# EAGLE board front_wheel_encoder (EAGLE 7.6.0)
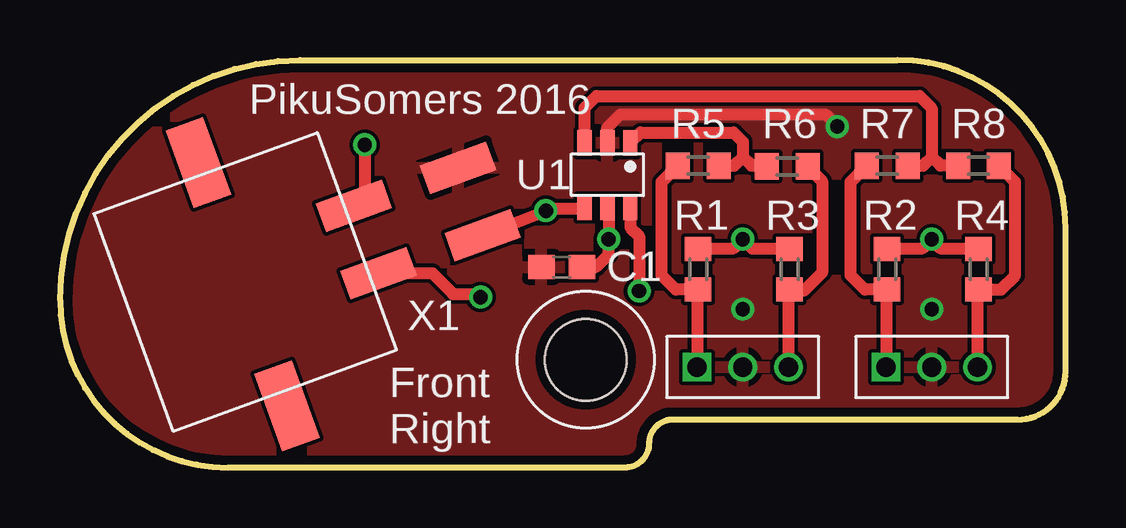
[diagram p0: board, top side]
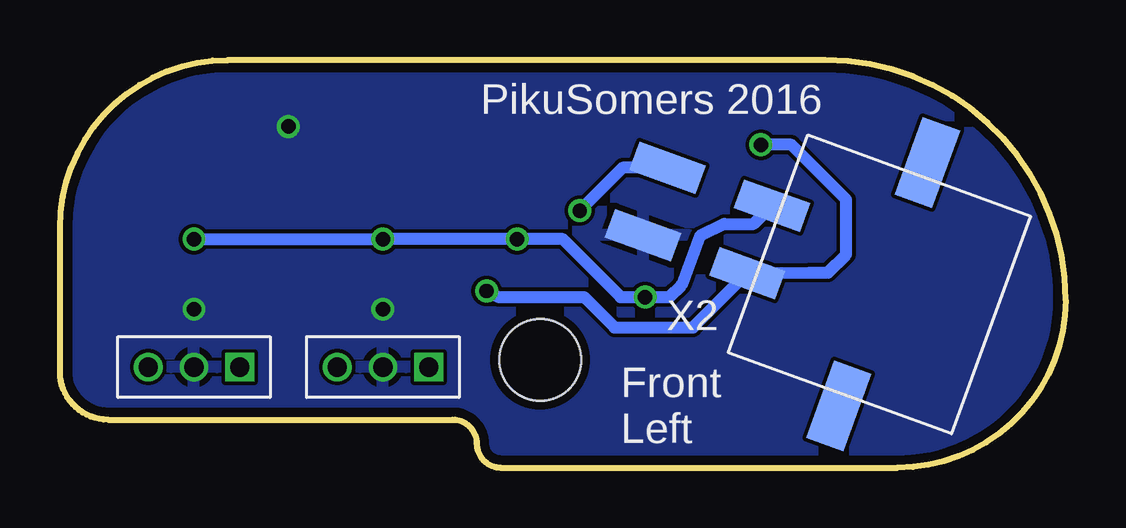
[diagram p1: board, bottom side, seen from below]

Size 41.9 x 17 mm. Coordinates in mm from the lower left corner, seen from the top.
Outline: 39.9,2 arc90 41.9,4 41.9,10 arc90 34.9,17 10,17 arc90 0,7 arc90 7,0 23.54,0 arc90 24.54,1 arc-90 25.54,2 39.9,2
Copper layers (1*16): Top 0.0356mm / dielectric 1.5011mm / Bottom 0.0356mm
Design rules "oshpark-2layer": minimum track width 6mil, minimum drill 13mil, track to track 6mil, track to pad 6mil, pad to pad 6mil, via to via 6mil, smd to smd 6mil, copper to edge 15mil, drill to drill 6mil, minimum pad ring 7mil, minimum via ring 7mil, stop-mask expansion 2.5mil, vias tented up to drill 0mil, thermal gap 10mil
Holes 3.4 mm at 21.9,4.5

## Footprints (pad centres in the part's own frame; a part is rotated, then mirrored left to right if it is on the bottom)
C0603 = smd 1.1 x 1: 1 -0.85,0; 2 0.85,0
HLC1395 = drill 0.8: COL 3.81,0; COM 1.905,0 | drill 0.8 square: LED+ 0,0
R0603 = smd 1 x 1.1: 1 -0.85,0; 2 0.85,0
SOT-23-6 = smd 0.6 x 1.05: 1 0,0; 2 0.95,0; 3 1.9,0; 4 1.9,2.7; 5 0.95,2.7; 6 0,2.7
MICROFIT-2X2-0430450411 = smd 1.27 x 2.921: 1 6.896,5.474; 2 3.899,5.474; 3 6.896,10.097; 4 3.899,10.097 | smd 3.429 x 1.651: NC1 0,0; NC2 10.795,0

## Placement (x,y rotation side)
C1  0.1uF  [C0603]  20.91,8.37 180 top
IR1  HLC1395  [HLC1395]  26.54,4.19 0 top
IR2  HLC1395  [HLC1395]  34.42,4.19 0 top
R1  200  [R0603]  26.59,8.27 90 top
R2  200  [R0603]  34.46,8.27 90 top
R3  4.7k  [R0603]  30.4,8.27 90 top
R4  4.7k  [R0603]  38.27,8.27 90 top
R5  0  [R0603]  26.59,12.59 0 top
R6  0  [R0603]  30.31,12.56 180 top
R7  0  [R0603]  34.46,12.59 0 top
R8  0  [R0603]  38.27,12.59 180 top
U1  SN74LVC2G17DBVR  [SOT-23-6]  23.76,13.54 180 top
X1  MICROFIT-2X2-SMD  [MICROFIT-2X2-0430450411]  5.77,12.71 290 top
X2  MICROFIT-2X2-SMD  [MICROFIT-2X2-0430450411]  9.46,2.57 70 bottom

## Library data of the parts
C1 R1-R8 = resistor
IR1 IR2 U1 X1 X2 = rover12

## Nets
+5V: C1.1 R1.2 R2.2 R3.2 R4.2 U1.5 X1.1 X2.1
GND: C1.2 IR1.COM IR2.COM U1.2 X1.4 X2.4
N$1: IR1.LED+ R1.1 R5.1
N$2: IR2.LED+ R2.1 R7.1
N$3: IR2.COL R4.1 R8.1
N$4: U1.4 X1.3 X2.3
N$5: U1.6 X1.2 X2.2
N$6: IR1.COL R3.1 R6.1
SENSE1: R5.2 R6.2 U1.1
SENSE2: R7.2 R8.2 U1.3

## Tracks (layer width: path | path; a pad name or v marks a point on that pad's centre or on a via)
+5V  (via drill 0.6)
  Top 0.508: R1.2 26.62,9.14 28.07,9.14 v28.45,9.53 28.86,9.12 R3.2 | R2.2 34.49,9.14 35.94,9.14 v36.32,9.53 36.73,9.12 R4.2 | U1.5 22.86,10.84 v22.86,9.53 22.86,8.89 22.34,8.37 C1.1 | X1.1 15.52,8.11 16.38,7.24 17.4,7.24 v17.53,7.11
  Bottom 0.508: v36.32,9.53 v28.45,9.53 v22.86,9.53 20.95,9.53 18.54,7.11 v17.53,7.11 16.51,7.11 16,7.62 15.24,9.65 14.22,10.16 13.01,10.16 X2.1
GND  (via drill 0.6)
  Top 0.508: U1.2 22.81,14.18 23.37,14.73 31.88,14.73 v32.38,14.22
  other vias: 28.45,6.6 36.32,6.6
  pour Bottom: 6.86,0 23.8,0 arc90 24.56,0.76 24.56,1.02 arc-90 25.57,2.03 40.13,2.03 arc90 41.91,3.81 41.91,10.16 arc90 35.05,17.02 9.91,17.02 arc90 0,7.11 0,6.86 arc90
  pour Top: 6.86,0 23.54,0 arc90 24.56,1.02 arc-90 25.57,2.03 40.13,2.03 arc90 41.91,3.81 41.91,10.16 arc90 35.05,17.02 9.91,17.02 arc90 0,7.11 0,6.86 arc90
N$1
  Top 0.508: R5.1 25.07,11.91 25.07,8.01 25.66,7.42 R1.1 26.54,7.42 IR1.LED+
N$2
  Top 0.508: R7.1 32.94,11.91 32.94,8.01 33.54,7.42 R2.1 34.42,7.42 IR2.LED+
N$3
  Top 0.508: R8.1 39.8,11.91 39.8,8.01 39.2,7.42 R4.1 38.23,7.42 IR2.COL
N$4  (via drill 0.6)
  Top 0.508: X1.3 20.11,10.66 | 20.11,10.66 v20.25,10.72 | v20.25,10.72 20.45,10.79 21.86,10.79 U1.4 | v20.25,10.72 20.16,10.72 20.11,10.66
  Bottom 0.508: X2.3 18.46,12.51 v20.25,10.72
N$5  (via drill 0.6)
  Top 0.508: U1.6 23.76,10.02 24.13,9.65 v24.13,7.37 | v12.7,13.46 12.7,11.38 X1.2
  Bottom 0.508: v24.13,7.37 23.62,7.11 20.07,7.11 18.8,5.84 15.53,5.84 X2.2 12.43,8.11 10.67,8.13 9.91,8.13 9.14,8.89 9.14,11.18 11.43,13.46 v12.7,13.46
N$6
  Top 0.508: R6.1 31.16,12.53 31.75,11.94 31.75,8.13 30.99,7.37 30.45,7.37 R3.1 30.35,7.42 IR1.COL
SENSE1
  Top 0.508: R5.2 28.08,12.59 28.45,12.95 | 28.45,12.95 28.82,12.59 29.43,12.59 R6.2 | 28.45,12.95 28.45,13.59 28.07,13.97 24.19,13.97 U1.1
SENSE2
  Top 0.508: R7.2 35.95,12.59 36.32,12.95 | R8.2 36.69,12.59 36.32,12.95 | U1.3 21.86,15 22.35,15.49 35.81,15.49 36.32,14.99 36.32,12.95

## Text on the board
tPlace: PikuSomers 2016 | Front / Right
bPlace: PikuSomers 2016 | Front / Left